# Altium PCB K60 2014 12 12.PcbDoc
Units mil, origin at the board's own origin, x right, y up, seen from the top; angles counter-clockwise.
Board outline 2553 x 1966 mil, 4 copper layers (Top Layer, Internal Plane 1, Internal Plane 2, Bottom Layer); 47 components, 90 nets, 356 pads, 34 vias.
Unrouted connection lines stored in the file: 4.
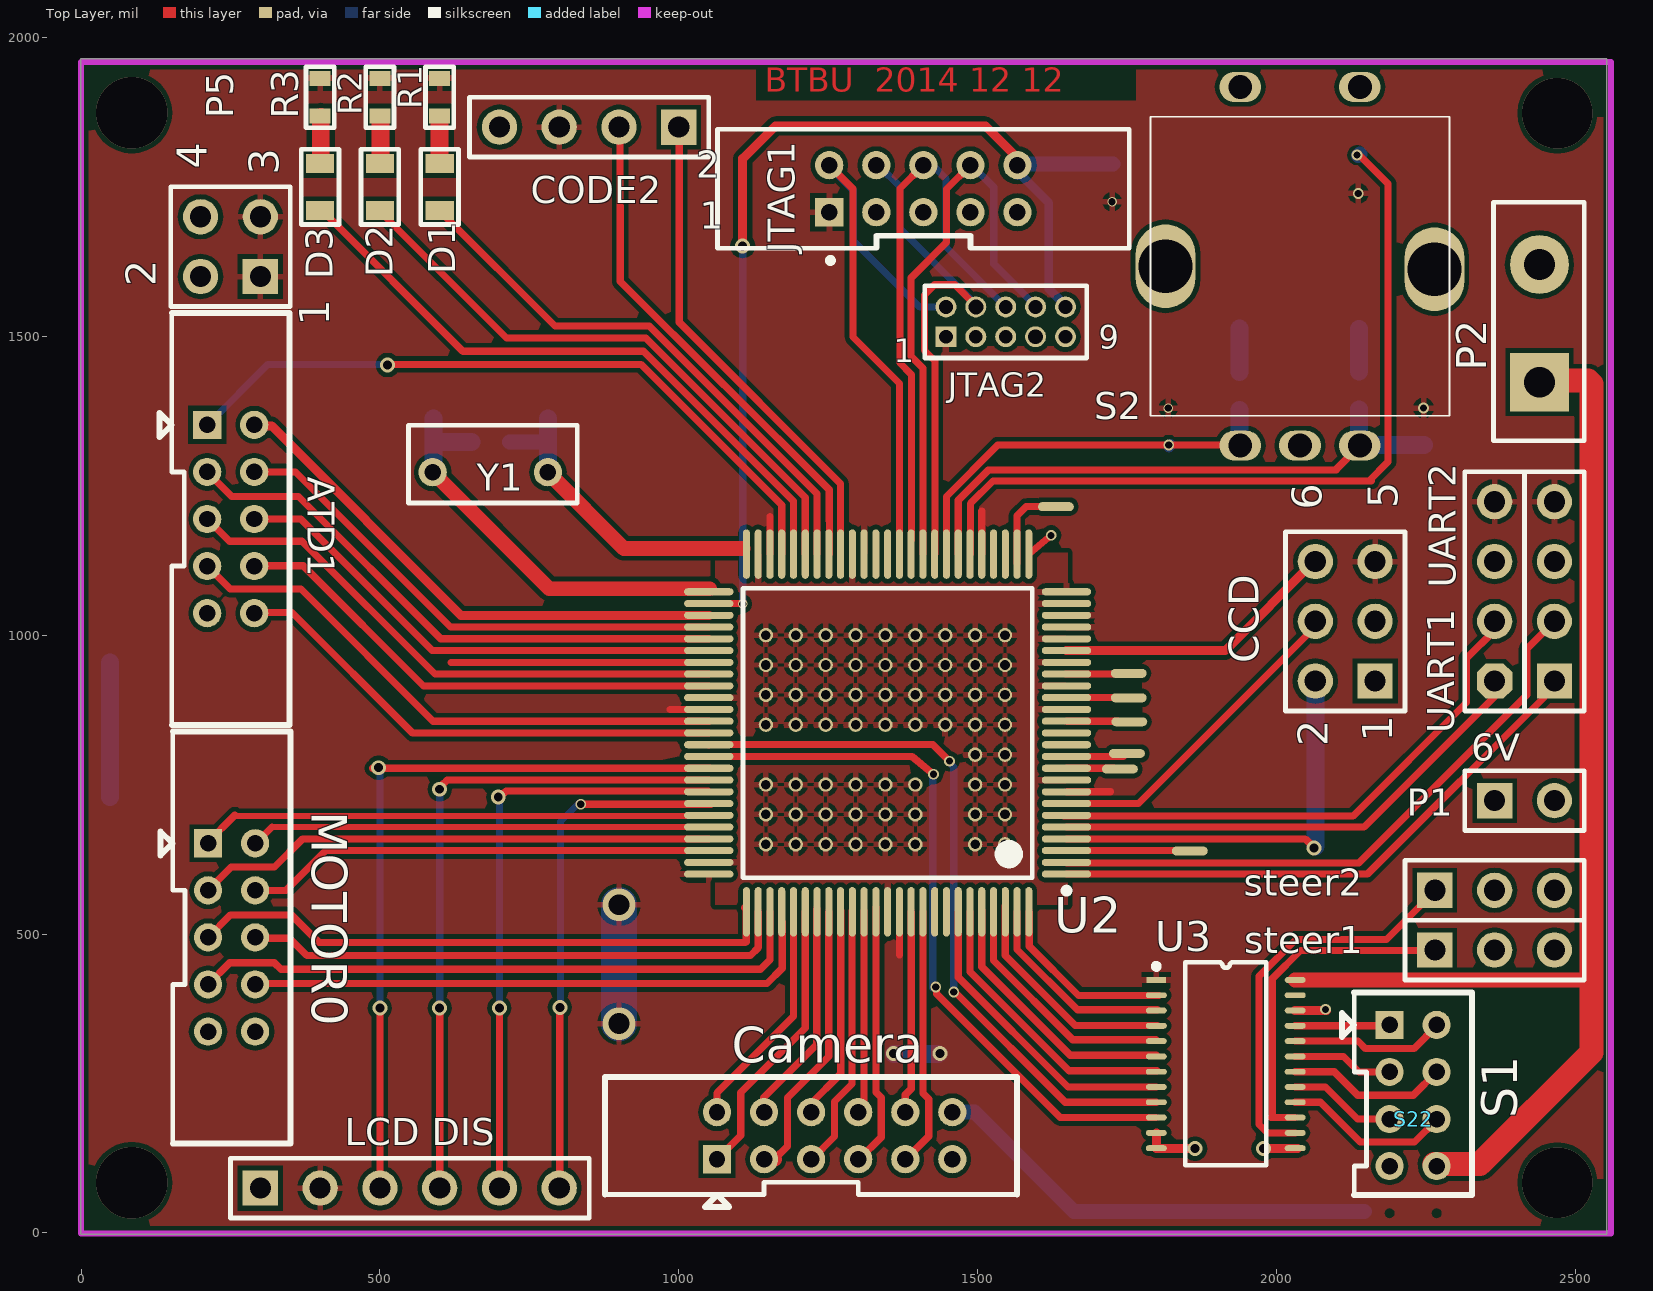
[diagram p0: Top Layer view]
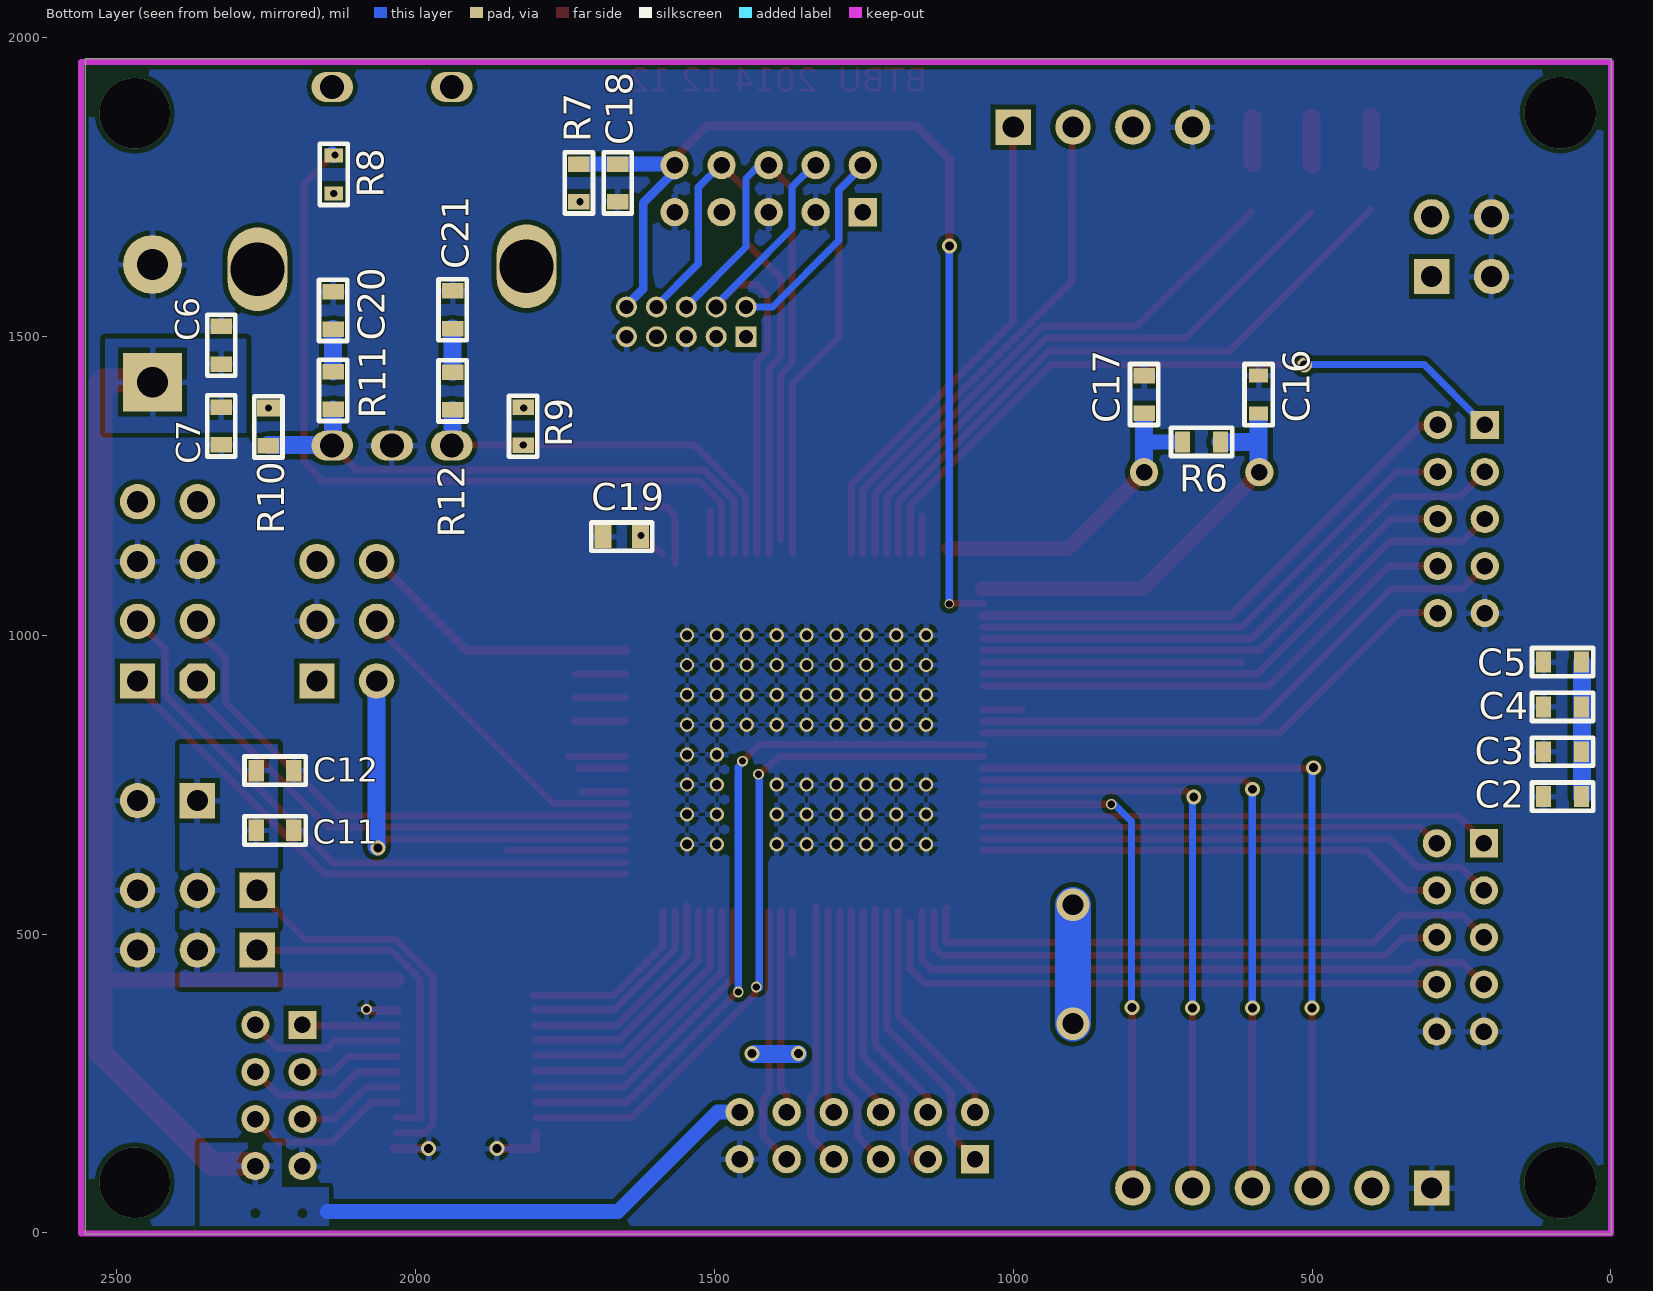
[diagram p1: Bottom Layer view, seen from below]
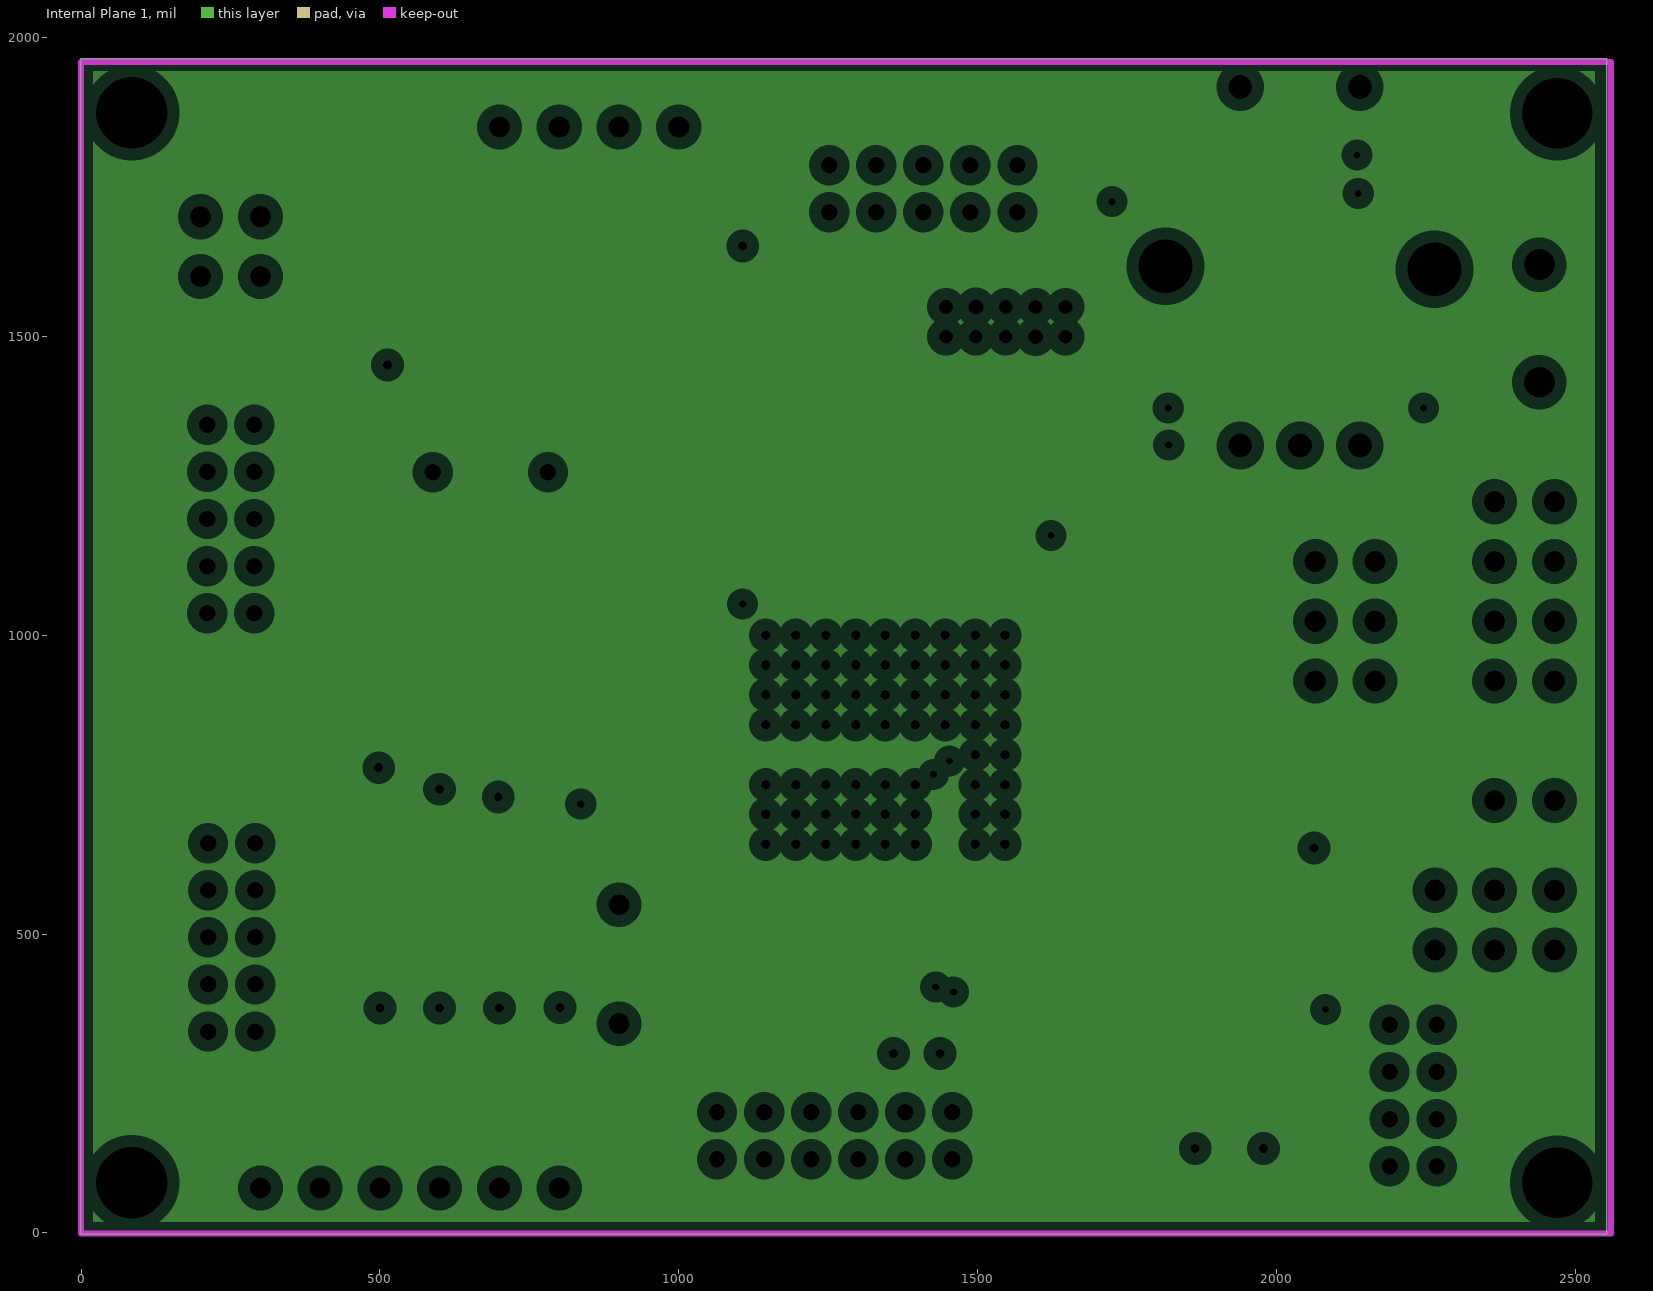
[diagram p2: Internal Plane 1, clearances drawn from the general rule]
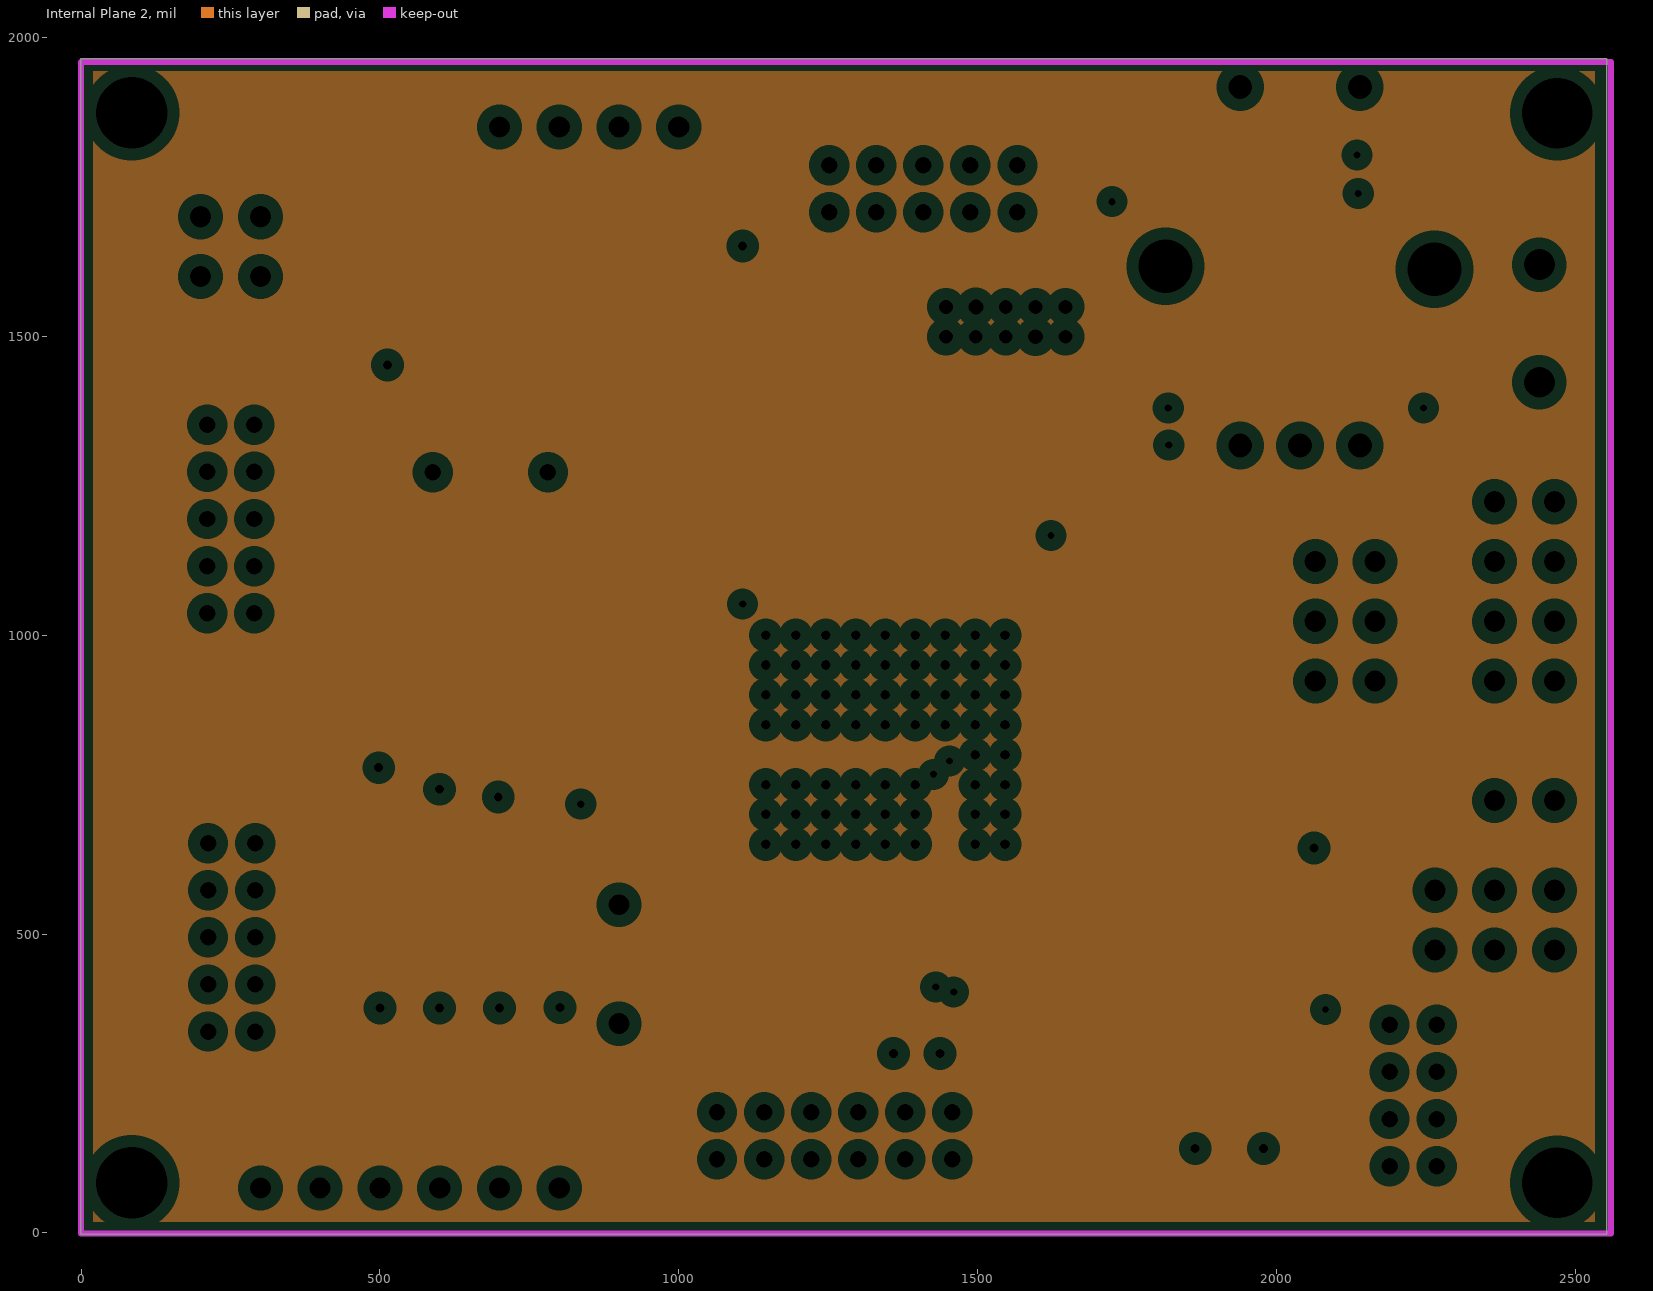
[diagram p3: Internal Plane 2, clearances drawn from the general rule]

## Layer stack, top to bottom
Top Layer: signal copper 1.4
Dielectric: dielectric 12.6, FR-4, Dk 4.8
Internal Plane 1: plane copper 1.4
Dielectric: dielectric 12.6, FR-4, Dk 4.8
Internal Plane 2: plane copper 1.4
Dielectric: dielectric 12.6, FR-4, Dk 4.8
Bottom Layer: signal copper 1.4

## Board outline
-0.22,1964.09 2552.78,1964.09 2552.78,-1.91 -0.22,-1.91

## Design rules (kind name [scope] priority, off if disabled: settings)
Clearance [All] p1: gap=6
ComponentClearance [All] p1: gap=10 collisioncheckmode=3 verticalgap=10
PlaneClearance [All] p1: clearance=20
PlaneConnect [All] p1: planeconnectstyle=Relief reliefexpansion=20 reliefentries=4 reliefconductorwidth=10 reliefairgap=10
PolygonConnect [All] p1: connectstyle=Relief reliefconductorwidth=10 reliefentries=4 polygonreliefangle="90 Angle"
RoomDefinition "K60 2014 12 12" [InComponentClass('K60 2014 12 12')] p1: confinementstyle=ConfineIn formatcopy=TRUE lockcomponents=FALSE outline 2597.78,-45.91 2815.78,-45.91 2815.78,474.09 2597.78,474.09
RoutingVias [All] p1: holewidth=14 width=20 viastyle="Through Hole" minholewidth=14 minwidth=20 maxholewidth=28 maxwidth=50
SolderMaskExpansion [All] p1: expansion=4
TestPointUsage FabricationTestPointUsage [All] p1: valid=0 allowmultiple=FALSE
Testpoint FabricationTestpoint [All] p1: side=3 testpointundercomponent=TRUE minsize=40 maxsize=100 preferedsize=60 minholesize=0 maxholesize=40 preferedholesize=32 testpointgrid=1 style=297 order=0123456789
Width [All] p1: maxlimit=300 minlimit=10 preferedwidth=12
16 further rules are at their usual default settings.

## Components (designator, comment, footprint, x,y, rotation, side; value= is the part's Value field where it differs from the comment)
ATD1 "JTAG" IDC10S#1 211.9,1352.05 r90 top locked
C2 "104" 0603#1 81,730 r180 bottom
C3 "104" 0603#1 81,805 r180 bottom
C4 "104" 0603#1 81,880 r180 bottom
C5 "104" 0603#1 81,955 r180 bottom
C6 "104" 0603#2 2325,1485 r270 bottom
C7 "104" 0603#2 2325,1350 r90 bottom
C11 "104" 0603#2 2234.96,673.23 r0 bottom
C12 "104" 0603#2 2234.96,773.23 r0 bottom
C16 "18uF" 0603#3 589.51,1402.61 r90 bottom
C17 "18uF" 0603#2 781.17,1402.65 r90 bottom
C18 "C1" 0603#2 1661.61,1756.54 r270 bottom
C19 "C1" 0603#4 1655,1165 r180 bottom
C20 "103" 0603#2 2137.79,1543.36 r270 bottom
C21 "103" 0603#2 1937.99,1544.35 r270 bottom
Camera "MHDR2X5" IDC10S#1 1063.74,124.09 r180 top locked (schematic designator VIDO)
CCD "Header 3X2" HDR2X3 2164.96,923.23 r90 top
CODE2 "编码器2" HDR1X4#1 1000,1850 r180 top
D1 "LED3" 0805 600,1750 r270 top
D2 "LED3" 0805 500,1750 r270 top
D3 "LED3" 0805 400,1750 r270 top
JTAG1 "JTAG" JTAG-2.0 1251.69,1707.6 r90 top
JTAG2 "JTAG" MHDR2X5 1446.96,1499.23 r0 top
"LCD DIS" "OLED12864" HDR1X6 300,75 r0 top
MOTOR0 "JTAG" IDC10S#1 213.34,652.09 r90 top
P1 "Header2" DIP2-2.54 2364.96,723.23 r0 top
P2 "5V接口" HDR1X2 2439.96,1423.23 r90 top
P5 "Header 2X2" HDR2X2 300,1600 r90 top
R1 "1K" 0603#1 600,1900 r90 top
R2 "1K" 0603#1 500,1900 r90 top
R3 "1K" 0603#1 400,1900 r90 top
R6 "10K" 0603#1 684.96,1323.23 r180 bottom
R7 "Res3" 0603#2 1726.61,1756.54 r90 bottom
R8 "10K" 0603#3 2136.8,1770.73 r90 bottom
R9 "10K" 0603#2 1819.88,1349.47 r270 bottom
R10 "10K" 0603#5 2246.06,1348.48 r270 bottom
R11 "10K" 0603#2 2137.79,1409.5 r270 bottom
R12 "10K" 0603#2 1937.99,1408.52 r90 bottom
S2 "" Code_Switch 2039.36,1617.18 r90 top locked
S22 "S1" IDC10S#2 2189.96,348.23 r90 top locked
steer1 "5V舵机接口" HDR1X3 2264.96,473.23 r0 top
steer2 "6V舵机接口" HDR1X3 2264.96,573.23 r0 top
U2 "MK60DX256VLL10 P100" 983-01_M 1349.43,836.39 r180 top locked
U3 "HD74LVCC3245A" HD74LVCC3245A 1798.96,423.23 r0 top
UART1 "蓝牙1(UART1)" HDR1X4#1 2464.96,923.23 r90 top
UART2 "蓝牙2(UART3)" HDR1X4#2 2364.96,923.23 r90 top
Y1 "4MHz" 晶振11.2-4.7-3.6 781.17,1272.65 r180 top

## Footprints (in the part's own frame and the unit in brackets; to place one, negate y for a bottom-side part, rotate by r counter-clockwise, add the part's x,y. Pads: shape width x height; smd on the part's side, far side on the other; paste and mask are expansions set on the pad)
0603#1 [mil]
  rect 25x35 smd: 1(-31.5,0) 2(31.5,0)
  silkscreen extent -51,-24 51,24
0603#2 [mil]
  rect 26x36 smd: 1(-31.5,0) 2(31.49,0)
  silkscreen extent -51,-24 51,24
0603#3 [mil]
  rect 23.62x31.5 smd: 1(-31.5,0) 2(31.5,0)
  silkscreen extent -51,-24 51,24
0603#4 [mil]
  rect 28x38 smd: 1(-31.5,0) 2(31.5,0)
  silkscreen extent -51,-24 51,24
0603#5 [mil]
  rect 28x38 smd: 1(-31.5,0)
  rect 26x36 smd: 2(31.5,0)
  silkscreen extent -51,-24 51,24
0805 [mm]
  rect 0.8x1.2 smd: 1(-1,0) 2(1,0)
  silkscreen extent -1.6,-0.8 1.6,0.8
983-01_M [mm]
  oval 2.1x0.3 smd: 1(-7.6,6) 2(-7.6,5.5) 3(-7.6,5) 4(-7.6,4.5) 5(-7.6,4) 6(-7.6,3.5) 7(-7.6,3) 8(-7.6,2.5) 9(-7.6,2) 10(-7.6,1.5) 11(-7.6,1) 12(-7.6,0.5) 13(-7.6,0) 14(-7.6,-0.5) 15(-7.6,-1) 16(-7.6,-1.5) 17(-7.6,-2) 18(-7.6,-2.5) 19(-7.6,-3) 20(-7.6,-3.5) 21(-7.6,-4) 22(-7.6,-4.5) 23(-7.6,-5) 24(-7.6,-5.5) 25(-7.6,-6) 51(7.6,-6) 52(7.6,-5.5) 53(7.6,-5) 54(7.6,-4.5) 55(7.6,-4) 56(7.6,-3.5) 57(7.6,-3) 58(7.6,-2.5) 59(7.6,-2) 60(7.6,-1.5) 61(7.6,-1) 62(7.6,-0.5) 63(7.6,0) 64(7.6,0.5) 65(7.6,1) 66(7.6,1.5) 67(7.6,2) 68(7.6,2.5) 69(7.6,3) 70(7.6,3.5) 71(7.6,4) 72(7.6,4.5) 73(7.6,5) 74(7.6,5.5) 75(7.6,6)
  oval 0.3x2.1 smd: 26(-6,-7.6) 27(-5.5,-7.6) 28(-5,-7.6) 29(-4.5,-7.6) 30(-4,-7.6) 31(-3.5,-7.6) 32(-3,-7.6) 33(-2.5,-7.6) 34(-2,-7.6) 35(-1.5,-7.6) 36(-1,-7.6) 37(-0.5,-7.6) 38(0,-7.6) 39(0.5,-7.6) 40(1,-7.6) 41(1.5,-7.6) 42(2,-7.6) 43(2.5,-7.6) 44(3,-7.6) 45(3.5,-7.6) 46(4,-7.6) 47(4.5,-7.6) 48(5,-7.6) 49(5.5,-7.6) 50(6,-7.6) 76(6,7.6) 77(5.5,7.6) 78(5,7.6) 79(4.5,7.6) 80(4,7.6) 81(3.5,7.6) 82(3,7.6) 83(2.5,7.6) 84(2,7.6) 85(1.5,7.6) 86(1,7.6) 87(0.5,7.6) 88(0,7.6) 89(-0.5,7.6) 90(-1,7.6) 91(-1.5,7.6) 92(-2,7.6) 93(-2.5,7.6) 94(-3,7.6) 95(-3.5,7.6) 96(-4,7.6) 97(-4.5,7.6) 98(-5,7.6) 99(-5.5,7.6) 100(-6,7.6)
  silkscreen extent -7.73,-6.15 6.15,6.82, body extent -7,-7 7,7, height 1.6
Code_Switch [mil]
  oval 50x70 hole 40: 1(-300,100) 2(-300,0) 3(-300,-100) 4(300,-100) 5(300,100)
  oval 140x100 hole 90: 6(-5,-225) 7(0,225)
  silkscreen extent -250,-250 250,250
DIP2-2.54 [mm]
  rect 1.5x1.5 hole 0.9: 1(0,0)
  round 1.5 hole 0.9: 2(2.54,0)
  silkscreen extent -1.27,-1.27 3.81,1.27
HD74LVCC3245A [mm]
  rect 0.838x0.25 smd: 1(0,0)
  oval 0.889x0.25 smd: 2(0,-0.65) 3(0,-1.3) 4(0,-1.95) 5(0,-2.6) 6(0,-3.25) 7(0,-3.9) 8(0,-4.55) 9(0,-5.2) 10(0,-5.85) 11(0,-6.5) 12(0,-7.15) 13(5.9,-7.15) 14(5.9,-6.5) 15(5.9,-5.85) 16(5.9,-5.2) 17(5.9,-4.55) 18(5.9,-3.9) 19(5.9,-3.25) 20(5.9,-2.6) 21(5.9,-1.95) 22(5.9,-1.3) 23(5.9,-0.65) 24(5.9,0)
  silkscreen extent -0.11,-7.87 4.67,0.75
HDR1X2 [mm] "Connector; Header; 2 Position"
  rect 2.5x2.5 hole 1.3: 1(0,0)
  round 2.5 hole 1.3: 2(5,0)
  silkscreen extent -2.49,-1.91 7.65,1.96
HDR1X3 [mm]
  rect 1.5x1.5 hole 0.9: 1(0,0)
  round 1.5 hole 0.9: 2(2.54,0) 3(5.08,0)
  silkscreen extent -1.27,-1.27 6.35,1.27
HDR1X4#1 [mm] "Connector; Header; 4 Position"
  rect 1.5x1.5 hole 0.9: 1(0,0)
  round 1.5 hole 0.9: 2(2.54,0) 3(5.08,0) 4(7.62,0)
  silkscreen extent -1.27,-1.27 8.89,1.27
HDR1X4#2 [mm]
  oct 1.5x1.5 hole 0.9: 1(0,0)
  round 1.5 hole 0.9: 2(2.54,0) 3(5.08,0) 4(7.62,0)
  silkscreen extent -1.27,-1.27 8.89,1.27
HDR1X6 [mm]
  rect 1.5x1.5 hole 0.9: 1(0,0)
  round 1.5 hole 0.9: 2(2.54,0) 3(5.08,0) 4(7.62,0) 5(10.16,0) 6(12.7,0)
  silkscreen extent -1.27,-1.27 13.97,1.27
HDR2X2 [mm] "Connector; Header; 2x2 Position"
  rect 1.5x1.5 hole 0.9: 1(0,0)
  round 1.5 hole 0.9: 2(0,2.54) 3(2.54,0) 4(2.54,2.54)
  silkscreen extent -1.27,-1.27 3.81,3.81
HDR2X3 [mm] "Connector; Header; 3x2 Position"
  rect 1.5x1.5 hole 0.9: 1(0,0)
  round 1.5 hole 0.9: 2(0,2.54) 3(2.54,0) 4(2.54,2.54) 5(5.08,0) 6(5.08,2.54)
  silkscreen extent -1.27,-1.27 6.35,3.81
IDC10S#1 [mm]
  rect 1.2x1.2 hole 0.7: 1(-0.006,0.022)
  round 1.2 hole 0.7: 2(-0.006,-1.978) 3(-2.006,0.022) 4(-2.006,-1.978) 5(-4.006,0.022) 6(-4.006,-1.978) 7(-6.006,0.022) 8(-6.006,-1.978) 9(-8.006,0.022) 10(-8.006,-1.978)
  silkscreen extent -12.76,-3.48 4.74,2.04
IDC10S#2 [mm]
  rect 1.2x1.2 hole 0.7: 1(-0.006,0.022)
  round 1.2 hole 0.7: 2(-0.006,-1.978) 3(-2.006,0.022) 4(-2.006,-1.978) 5(-4.006,0.022) 6(-4.006,-1.978) 7(-6.006,0.022) 8(-6.006,-1.978)
  round 0 all layers, no hole: 9(-8.006,0.022) 10(-8.006,-1.978)
  silkscreen extent -7.24,-3.48 1.37,2.04
JTAG-2.0 [mm]
  rect 1.2x1.2 hole 0.7: 1(0,0)
  round 1.2 hole 0.7: 2(2,0) 3(0,-2) 4(2,-2) 5(0,-4) 6(2,-4) 7(0,-6) 8(2,-6) 9(0,-8) 10(2,-8)
  silkscreen extent -2.15,-12.75 3.52,4.75
MHDR2X5 [mil] "Connector; Header; 5x2 Position"
  rect 35x35 hole 23: 1(0,0)
  round 35 hole 23: 2(0,50) 3(50,0) 5(100,0) 6(100,50) 8(150,50) 9(200,0) 10(200,50)
  round 35 hole 25: 4(50,50) 7(150,0)
  silkscreen extent -35,-35 235,85
晶振11.2-4.7-3.6 [mm]
  round 1.2 hole 0.7: 1(0,0) 2(4.9,0)
  silkscreen extent -1.24,-1.99 5.92,1.31

## Part data
ATD1: library part "Header 3X2A", "Header, 3-Pin"
C18 C19: library part "Cap Semi"
Camera: "Header, 5-Pin, Dual row"
CCD: "Header, 3-Pin, Dual row"
CODE2 steer1 steer2: library part "Header 3", "He"
JTAG1: library part MHDR2X5
JTAG2 MOTOR0: library part MHDR2X5, "Header, 5-Pin, Dual row"
"LCD DIS": library part "Header 6", "He"
P2: library part "Header 4", "Header, 4-Pin"
P5: library part "Header 4X2", "Header, 4-Pin, Dual row"
R6: library part Res0603, "Resistor"
S2: library part SW-SPDT, "SPDT Subminiature Toggle Switch, Right Angle Mounting, Vert"
U2: library part MC68LC302PU16, "Low Cost Integr"
U3: "Octal Bus Transceiver with adjustable output voltage  and"
UART1 UART2: library part "Header 4", "He"

## Free pads (board coordinates)
  round 47.24 hole 28: 0(1457.66,123.23) 1(1457.66,201.97)
  oval 60x15 smd: 0(1631,1215) 0(1738,776) 0(1749.78,802.09) 0(1752.78,895.09) 0(1752.78,936.09) 0(1753.78,855.09) 0(1855,639)
  round 24 hole 16: 2(1145.78,1000.09) 3(1195.78,1000.09) 4(1245.78,1000.09) 5(1295.78,1000.09) 6(1345.78,1000.09) 7(1395.78,1000.09) 8(1445.78,1000.09) 9(1495.78,1000.09) 10(1545.78,1000.09) 11(1545.78,950.09) 12(1495.78,950.09) 13(1445.78,950.09) 14(1395.78,950.09) 15(1345.78,950.09) 16(1295.78,950.09) 17(1245.78,950.09) 18(1195.78,950.09) 19(1145.78,950.09) 20(1145.78,900.09) 21(1195.78,900.09) 22(1245.78,900.09) 23(1295.78,900.09) 24(1345.78,900.09) 25(1395.78,900.09) 26(1445.78,900.09) 27(1495.78,900.09) 28(1545.78,900.09) 29(1545.78,850.09) 30(1495.78,850.09) 31(1445.78,850.09) 32(1395.78,850.09) 33(1345.78,850.09) 34(1295.78,850.09) 35(1245.78,850.09) 36(1195.78,850.09) 37(1145.78,850.09) 45(1495.78,800.09) 46(1545.78,800.09) 47(1545.78,750.09) 48(1495.78,750.09) 50(1395.78,750.09) 51(1345.78,750.09) 52(1295.78,750.09) 53(1245.78,750.09) 54(1195.78,750.09) 55(1145.78,750.09) 56(1145.78,700.09) 57(1195.78,700.09) 58(1245.78,700.09) 59(1295.78,700.09) 60(1345.78,700.09) 61(1395.78,700.09) 63(1495.78,700.09) 64(1545.78,700.09) 65(1545.78,650.09) 66(1495.78,650.09) 68(1395.78,650.09) 69(1345.78,650.09) 70(1295.78,650.09) 71(1245.78,650.09) 72(1195.78,650.09) 73(1145.78,650.09)

## Via types
v1: diameter 25, hole 15, Top Layer to Bottom Layer, 14 vias
v2: diameter 18, hole 12, Top Layer to Bottom Layer, 11 vias
v3: diameter 16, hole 12, Top Layer to Bottom Layer, 3 vias
v4: diameter 55, hole 35, Top Layer to Bottom Layer, 2 vias
v5: diameter 118.11, hole 118.11, Top Layer to Bottom Layer, 2 vias
v6: diameter 120, hole 120, Top Layer to Bottom Layer, 2 vias

## Nets (pads, with @x,y where several pads share a name; then routed paths per layer and width w, separated by ;. In a path a pad name is that pad's centre, name@x,y a point inside that pad or via, vN(x,y) a via of type N, cw(c..) or ccw(c..) an arc to the next point about the centre after c; other vN are vias at no path point)
3.3V: "LCD DIS.2" C2.2 C3.2 C4.2 C5.2 CCD.5 CODE2.3 JTAG1.1 JTAG2.1 P5.1 P5.3 R1.2 R2.2 R3.2 R7.1 R8.1 R9.1 R10.1 U2.8 U2.22 U2.23 U2.30 U2.40 U2.48 U2.61 U2.75 U2.89 U3.1 UART1.4 UART2.4 | length 843.7
  Top Layer w12: 985.23,875.77 U2.61 ; U2.48 1152.58,1198.58 ; 1369.12,465.12 U2.89 ; U2.30 1506.91,1207.91 ; U2.8 1721.97,737.97
  Bottom Layer w30: C2.2@48.51,729 C5.2@48.51,954 ; v1@1360,299 v1@1434,299
  Bottom Layer w60: v4(900,350) v4(900,549)
  other v1: 1359,300 1437,300
  other v2: 2246.06,1379.98 2136.78,1739.09
  other v3: 1818.9,1379.92 1724.96,1725.23
5V: C6.2 C7.2 P2.1 pad.1 S22.8 U3.24 | length 2797.4
  Top Layer w25: U3.24 2523.77,423.23 ; 2521,1426 2522,1425
  Top Layer w40: S22.8@2264,115 2340,115 2526.78,301.78 2526.78,1420.22 2522,1425 ; P2.1@2441,1426 2521,1426
  Bottom Layer w25: pad.1 1495.03,201.97 1661,36 2147,36
6V: C11.2 C12.2 P1.1 steer1.2 steer2.2
ADC0_DP1: pad.0@1753.78,855.09 U2.14 | length 86.1
  Top Layer w12: U2.14 pad.0@1734.78,856.08
ADC1_DP1: pad.0@1752.78,895.09 U2.16 | length 84.1
  Top Layer w12: U2.16 pad.0@1732.78,895.45
AO: CCD.6 U2.20 | length 480.3
  Top Layer w15: U2.20 1913.92,974.19 CCD.6@2065.96,1126.23
BKPT*/TMS: JTAG1.2 JTAG2.2 U2.37 | length 1043.1
  Top Layer w10: 1291.22,1746.81 1291.22,1745.98 1291.3,1745.91
  Top Layer w12: JTAG1.2 1291.22,1746.81 ; 1291.3,1745.91 1291.3,1498.89 1369.12,1421.07 U2.37
  Bottom Layer w12: JTAG1.2 1251.69,1784.5 1291.96,1744.23 1291.96,1660.23 1402.96,1549.23 JTAG2.2
CLK: CCD.4 U2.7 | length 543.6
  Top Layer w12: U2.7@1646.65,718.29 1769.02,718.29 2065.46,1014.73 CCD.4@2067.46,1014.73
CLK_LCD: "LCD DIS.3" U2.66 | length 1264
  Top Layer w12: v1@487.96,777.23 U2.66@1051.96,777.23 ; 500,76.23 v1(500,376.23)
  Bottom Layer w12: v1@500,377.23 v1@500,777.23
  other v1: 498,778.23
CS: "LCD DIS.5" U2.68 | length 1006.3
  Top Layer w12: 700,76.23 v1(700,376.23) ; v1@701,731.23 705.77,736 708,736 711.23,739.23 U2.68@1049.96,739.23
  Bottom Layer w12: v1@700,377.23 v1@700,731.23
  other v1: 698,729.23
D/C: "LCD DIS.6" U2.69 | length 879.2
  Top Layer w12: 801,75.23 v1(801,377.23) ; v2@835,717.23 U2.69@1053.96,717.23
  Bottom Layer w12: v1@802,375.23 802,688.23 v2@834,720.23
  other v2: 836,717.23
DACOUT: pad.0@1631,1215 U2.27 | length 142
  Top Layer w12: U2.27@1565.78,1120.09 1565.78,1199.78 1581,1215 pad.0@1621.78,1215
DSCLK/TCLK: JTAG1.4 JTAG2.4 U2.34 | length 858.2
  Top Layer w12: U2.34@1428.49,1135.61 1428.49,1458.7 1410.96,1476.23 1410.96,1569.23 1427.96,1586.23 1461.96,1586.23 JTAG2.4@1498.96,1549.23
  Bottom Layer w12: JTAG1.4 1333.85,1786.34 1369.96,1750.23 1369.96,1680.23 1449.96,1600.23 ; 1450.96,1599.23 JTAG2.4@1499.96,1550.23
DSI/TSI: JTAG1.8 JTAG2.8 U2.35 | length 984.3
  Top Layer w12: U2.35 1408.49,1446.7 1388.78,1466.41 1388.78,1598.05 1448.06,1657.33 1448.06,1746.22 ; 1447.79,1746.22 JTAG1.8
  Bottom Layer w12: JTAG1.8 1489.85,1786.34 1526.96,1749.23 1526.96,1621.23 JTAG2.8@1598.96,1549.23
DSO/TSO: JTAG1.6 JTAG2.6 U2.36 | length 954.3
  Top Layer w12: U2.36@1389.12,1159.51 1389.12,1436.07 1370.06,1455.13 1370.06,1747.22 JTAG1.6
  Bottom Layer w12: JTAG1.6 1424.85,1786.34 1446.96,1764.23 1446.96,1649.23 JTAG2.6
EXTAL: C17.1 R6.1 U2.50 Y1.1 | length 534.2
  Top Layer w25: Y1.1@781.17,1273.68 781.17,1272.02 908.06,1145.13 U2.50@1107.82,1145.13
  Bottom Layer w25: R6.1 781.17,1323.23
  Bottom Layer w30: Y1.1@781.17,1273.68 C17.1@781.17,1362.26
GND: "LCD DIS.1" ATD1.9 C2.1 C3.1 C4.1 C5.1 C6.1 C7.1 C11.1 C12.1 C16.2 C17.2 C18.2 C19.1 C20.1 C21.1 CCD.3 CODE2.4 JTAG1.3 JTAG1.5 JTAG1.9 JTAG2.3 JTAG2.5 JTAG2.9 MOTOR0.9 MOTOR0.10 P1.2 P2.2 P5.2 P5.4 pad.0@1457.66,123.23 pad.2 pad.3 pad.4 pad.5 pad.6 pad.7 pad.8 pad.9 pad.10 pad.11 pad.12 pad.13 pad.14 pad.15 pad.16 pad.17 pad.18 pad.19 pad.20 pad.21 pad.22 pad.23 pad.24 pad.25 pad.26 pad.27 pad.28 pad.29 pad.30 pad.31 pad.32 pad.33 pad.34 pad.35 pad.36 pad.37 pad.45 pad.46 pad.47 pad.48 pad.50 pad.51 pad.52 pad.53 pad.54 pad.55 pad.56 pad.57 pad.58 pad.59 pad.60 pad.61 pad.63 pad.64 pad.65 pad.66 pad.68 pad.69 pad.70 pad.71 pad.72 pad.73 S2.2 S22.7 steer1.3 steer2.3 U2.9 U2.15 U2.17 U2.19 U2.21 U2.24 U2.25 U2.41 U2.49 U2.60 U2.74 U2.88 U3.11 U3.12 U3.13 U3.22 UART1.3 UART2.3 | length 199.1
  Top Layer w15: U3.11 1798.96,141.04 1799,141 v1@1862,141 ; v1(1978,141) U3.13@2035,141 ; U3.22 v2@2084.05,372.05
  other v1: 1864,141
  other v2: 2082,374
MODE: "LCD DIS.4" U2.67 | length 1125.4
  Top Layer w12: v1@599,745.23 605.77,752 607,752 612.65,757.66 U2.67 ; 600,76.23 v1(600,376.23)
  Bottom Layer w12: v1(600,376.23) v1@600,745.23
  other v1: 600,742.23
NetC20_2: C20.2 R11.1 | length 70.9
  Bottom Layer w30: R11.1 C20.2
NetC21_2: C21.2 R12.2 | length 72.8
  Bottom Layer w30: R12.2 C21.2
NetD1_1: D1.1 R1.1 | length 77.3
  Top Layer w20: D1.1@598.42,1788.39 D1.1@600,1789.96
  Top Layer w30: D1.1@600,1789.96 R1.1@600,1865
NetD2_1: D2.1 R2.1 | length 83.6
  Top Layer w20: D2.1@496.06,1783.47 D2.1@501,1788.4
  Top Layer w30: D2.1@501,1788.4 R2.1@501,1865
NetD3_1: D3.1 R3.1 | length 79.3
  Top Layer w20: D3.1@398.43,1788.77 D3.1@401,1791.33
  Top Layer w30: D3.1@401,1791.33 R3.1@401,1867
PGA0_DP: pad.0@1752.78,936.09 U2.18 | length 86
  Top Layer w12: U2.18@1646.78,935.09 pad.0@1732.78,935.09
PTA14: D1.2 U2.44 | length 925.8
  Top Layer w12: D1.2@601.78,1708.09 792.78,1517.09 950.78,1517.09 1231.32,1236.54 U2.44
PTA15: D2.2 U2.45 | length 1002
  Top Layer w12: D2.2@501.78,1707.09 711.78,1497.09 944.78,1497.09 1211.64,1230.23 U2.45
PTA16: D3.2 U2.46 | length 1081.4
  Top Layer w12: D3.2@402.78,1713.09 402.78,1711.09 638.78,1475.09 940.91,1475.09 1191.95,1224.05 U2.46
PTA17: ATD1.1 U2.47 | length 1186
  Top Layer w12: ATD1.1@208.86,1354.01 ATD1.1@213.86,1354.01 ; v1@515,1453.09 936.78,1453.09 1172.27,1217.6 U2.47
  Bottom Layer w12: ATD1.1@213.86,1354.01 312.94,1453.09 v1@517,1453.09
  other v1: 513,1452
PTB0: ATD1.2 U2.53 | length 892.7
  Top Layer w15: ATD1.2@288.78,1350.09 318.78,1350.09 635.62,1033.25 U2.53
PTB1: ATD1.4 U2.54 | length 867.9
  Top Layer w12: ATD1.4 358.78,1273.09 618.31,1013.56 U2.54
PTB2: ATD1.3 U2.55 | length 966.8
  Top Layer w12: ATD1.3 252.03,1232.06 321.93,1232.03 ; 309.94,1232.03 363.91,1232.01 601.65,994.07 U2.55
PTB3: ATD1.6 U2.56 | length 887.3
  Top Layer w12: ATD1.6@288.78,1194.09 367.78,1194.09 587.68,974.19 U2.56 ; ATD1.6 324.6,1194.35
PTB9: U2.57 | length 431.4
  Top Layer w12: 618.78,954.51 U2.57
PTB10: ATD1.5 U2.58 | length 946.7
  Top Layer w12: ATD1.5 248.34,1157.05 369.82,1157.05 592.05,934.82 U2.58
PTB11: ATD1.8 U2.59 | length 886.2
  Top Layer w12: ATD1.8@285.78,1116.09 371.78,1116.09 572.73,915.14 U2.59 ; ATD1.8 328.34,1115.61
PTB16: ATD1.7 U2.62 | length 946.7
  Top Layer w12: ATD1.7 249.6,1077.05 367.82,1077.05 588.79,856.08 U2.62
PTB17: ATD1.10 U2.63 | length 844.7
  Top Layer w12: ATD1.10@289.78,1038.09 352.78,1038.09 554.78,836.09 U2.63@1050.78,836.09
PTB18: U2.64 U3.9 | length 1216.6
  Top Layer w12: U2.64 1424.92,817.23 v2@1453.48,788.74 ; v2@1461.96,403.23 1646.68,218.51 ; 1645.96,218.51 U3.9
  Bottom Layer w12: v2@1451.96,787.23 1459.96,779.23 v2(1459.96,403.23)
  other v2: 1452.96,789.23
PTB19: U2.65 U3.10 | length 1204.7
  Top Layer w12: U2.65 1390.16,797.03 v2(1425.96,767.23) ; v2@1430.96,411.23 1430.96,400.23 1638.28,192.91 ; 1638.96,192.91 U3.10
  Bottom Layer w12: v2@1424.96,410.23 v2@1424.96,764.23
  other v2: 1429.96,411.23
PTC0: MOTOR0.1 U2.70 | length 857.3
  Top Layer w10: 257.29,697.23 U2.70@1050.22,697.23
  Top Layer w12: MOTOR0.1@211.78,653.09 257.29,698.6
PTC1: MOTOR0.2 U2.71 | length 768.6
  Top Layer w10: 319.61,678.92 U2.71
  Top Layer w12: MOTOR0.2@292.78,652.09 319.61,678.92
PTC2: MOTOR0.3 U2.72 | length 873.4
  Top Layer w12: MOTOR0.3 251.44,612.09 323.78,612.09 370.92,659.23 U2.72
PTC3: MOTOR0.4 U2.73 | length 788
  Top Layer w12: MOTOR0.4@289.78,573.09 342.78,573.09 409.24,639.55 U2.73
PTC4: MOTOR0.5 U2.76 | length 993.6
  Top Layer w12: MOTOR0.5 250.18,532.09 351.78,532.09 397.78,486.09 1111.78,486.09 1112.78,487.09 1112.78,541.09 U2.76@1109.78,544.09
PTC5: MOTOR0.6 U2.77 | length 933.7
  Top Layer w12: MOTOR0.6@288.34,487.09 MOTOR0.6@298.34,497.09 ; MOTOR0.6@290.78,493.09 348.78,493.09 377.78,464.09 1119.78,464.09 1132.9,477.21 U2.77
PTC6: MOTOR0.7 U2.78 | length 1046.6
  Top Layer w12: MOTOR0.7 248.92,452.09 323.34,452.09 334.34,441.09 1136.78,441.09 1152.58,456.89 U2.78
PTC7: MOTOR0.8 U2.79 | length 971.8
  Top Layer w12: MOTOR0.8@291.22,412.09 296.22,417.09 1147.78,417.09 1173.27,442.58 U2.79@1173.27,519.74
PTC8: Camera.2 U2.80 | length 389.3
  Top Layer w12: Camera.2 1063.96,234.31 1191.96,362.31 U2.80@1191.96,538.23
PTC9: Camera.1 U2.81 | length 475.1
  Top Layer w12: Camera.1 1103.74,163.01 1103.74,235.09 1211.64,342.99 U2.81
PTC10: Camera.4 U2.82 | length 378.1
  Top Layer w12: Camera.4@1141.74,201.09 1141.74,226.01 1230.96,315.23 U2.82@1230.96,542.23
PTC11: Camera.3 U2.83 | length 468.9
  Top Layer w12: Camera.3@1159.88,123.23 1181.74,145.09 1181.74,226.01 1251.01,295.28 U2.83
  Top Layer w25: Camera.3 Camera.3@1159.88,123.23
PTC12: Camera.6 U2.84 | length 354.4
  Top Layer w12: Camera.6@1219.74,206.09 1219.74,215.01 1270.96,266.23 U2.84@1270.96,539.23
PTC13: Camera.5 U2.85 | length 445.4
  Top Layer w12: Camera.5@1221.74,122.09 1260.74,161.09 1260.74,220.01 1289.96,249.23 U2.85@1289.96,539.23
PTC14: Camera.8 U2.86 | length 339.3
  Top Layer w12: Camera.8@1299.96,204.23 1309.96,214.23 U2.86@1309.96,539.41
PTC15: Camera.7 U2.87 | length 441.1
  Top Layer w12: Camera.7@1301.74,123.09 1338.74,160.09 1338.74,226.45 1329.96,235.23 U2.87@1329.96,545.23
PTC16: Camera.10 U2.90 | length 339.3
  Top Layer w12: Camera.10 1378.92,231.19 1388.8,241.07 U2.90
PTC17: Camera.9 U2.91 | length 435.2
  Top Layer w12: Camera.9@1379.74,123.09 1418.31,161.67 1418.3,223.9 1408.53,233.66 1408.49,428.23 ; 1408.49,427.14 U2.91
PTC18: U2.92
PTD0: U2.93
PTD1: U2.94 U3.8 | length 517.1
  Top Layer w12: U2.94 1467.54,427.65 1651.09,244.09 ; 1650.96,244.09 U3.8
PTD2: U2.95 U3.7 | length 481.6
  Top Layer w12: U2.95 1487.23,436.96 1652.96,271.23 U3.7@1799.96,271.23
PTD3: U2.96 U3.6 | length 448.2
  Top Layer w12: U2.96@1506.78,540.09 1506.78,445.41 1654.96,297.23 U3.6@1798.96,297.23
PTD4: U2.97 U3.5 | length 407.8
  Top Layer w12: U2.97 1526.6,455.59 1658.96,323.23 U3.5@1797.96,323.23
PTD5: U2.98 U3.4 | length 385.3
  Top Layer w12: U2.98@1546.28,547.18 1546.28,463.91 1662.96,347.23 ; 1663.96,347.23 U3.4@1800.96,347.23
PTD6: U2.99 U3.3 | length 338.8
  Top Layer w12: U2.99 1565.97,474.22 1666.96,373.23 ; 1667.96,373.23 U3.3@1800.96,373.23
PTD7: U2.100 U3.2 | length 307.1
  Top Layer w12: U2.100@1586.48,537.2 1586.48,479.71 1668.96,397.23 ; 1669.96,397.23 U3.2@1802.96,397.23
PTE0: U2.1 UART1.1 | length 955
  Top Layer w12: U2.1 2151.91,600.18 2464.96,913.23 UART1.1@2464.96,922.23
PTE1: U2.2 UART1.2 | length 1028.9
  Top Layer w12: U2.2@1648.65,618.86 2137.78,618.96 2418.98,900.27 2418.96,977.21 UART1.2
PTE2: pad.0@1855,639 U2.3 | length 199.3
  Top Layer w12: U2.3 pad.0@1847.96,639.55
PTE3: CCD.2 U2.4 | length 702.4
  Top Layer w12: U2.4 2047.96,659.23 v1(2062.96,644.23)
  Bottom Layer w12: v1(2062.96,644.23) v1@2064.96,646.23
  Bottom Layer w30: v1@2064.96,646.23 CCD.2@2064.96,925.23
PTE4: U2.5 UART2.1 | length 832.7
  Top Layer w12: U2.5 2146.65,678.92 2364.96,897.23 UART2.1
PTE5: U2.6 UART2.2 | length 908.2
  Top Layer w12: U2.6@1643.96,697.23 2127.96,697.23 2317.96,887.23 2317.96,961.23 2364.96,1008.23 UART2.2
PTE24: R8.2 U2.31 | length 1354.4
  Top Layer w12: U2.31@1488.23,1135.61 1488.23,1220.54 1525.78,1258.09 2158.96,1258.09 ; v2@2137.78,1804.09 2186.78,1755.09 2186.78,1290.09 2154.78,1258.09
  Bottom Layer w25: R8.2 R8.2@2139.36,1804.78
  other v2: 2134.84,1803.15
PTE25: R10.2 R11.2 S2.3 U2.32 | length 971.6
  Top Layer w12: U2.32 1467.54,1225.85 1517.78,1276.09 2099.96,1276.09 ; 2098.27,1276.09 S2.3
  Bottom Layer w20: S2.3 S2.3@2139.56,1316.99 ; R10.2@2247.05,1317.91 R10.2@2248.03,1316.93
  Bottom Layer w30: S2.3@2137.8,1317.91 R10.2@2247.05,1317.91 ; S2.3@2137.79,1318.89 R11.2
PTE26: R9.2 R12.1 S2.1 U2.33 | length 689.2
  Top Layer w12: U2.33 1447.86,1232.17 1533.78,1318.09 S2.1@1942.78,1318.09
  Bottom Layer w12: S2.1@1937.99,1319.89 S2.1@1938.98,1318.9
  Bottom Layer w20: R9.2@1819.87,1316 R9.2@1822.43,1318.56
  Bottom Layer w30: S2.1@1937.99,1319.89 R12.1
  other v2: 1819.78,1318.09
PTM1_PHA: CODE2.1 U2.42 | length 824.3
  Top Layer w12: CODE2.1@1000.78,1848.09 1000.78,1523.41 1270.69,1253.5 U2.42
PTM1_PHB: CODE2.2 U2.43 | length 857.6
  Top Layer w12: CODE2.2@901.78,1848.09 902.23,1591.67 1251.82,1243.3 U2.43@1252.01,1135.61
RESET: C18.1 JTAG1.10 JTAG2.10 R7.2 U2.52 | length 1732.5
  Top Layer w12: U2.52 v3@1105.96,1052.93
  Top Layer w15: v1@1106.96,1654.23 1106.96,1797.23 1161.96,1852.23 1512.96,1852.23 1564.96,1800.23 JTAG1.10@1571.96,1800.23
  Bottom Layer w12: v3(1106.96,1052.23) v1@1106.96,1649.23
  Bottom Layer w15: JTAG1.10@1567.96,1774.23 1618.96,1723.23 1618.96,1579.23 JTAG2.10@1647.96,1550.23
  Bottom Layer w25: JTAG1.10@1567.96,1774.23 JTAG1.10@1567.96,1786.23 ; JTAG1.10@1568.35,1788.03 R7.2
  other v1: 1106.96,1651.23
STEER1: steer1.1 U3.15 | length 569.4
  Top Layer w12: U3.15 1991.28,192.91 1992.96,194.6 1992.96,425.23 2039.96,472.23 steer1.1@2269.96,472.23
STEER2: steer2.1 U3.14 | length 667.2
  Top Layer w12: U3.14 1985.05,167.32 1970.96,181.42 1970.96,429.23 2032.82,491.09 2183.82,491.09 steer2.1@2264.96,572.23
"TTL D1": S22.6 U3.16 | length 280.9
  Top Layer w12: U3.16 2073.68,218.5 2139.96,152.23 2230.96,152.23 S22.6@2268.96,190.23
"TTL D2": S22.5 U3.17 | length 180
  Top Layer w12: U3.17 2082.09,244.09 2135.66,190.53 S22.5
"TTL D3": S22.4 U3.18 | length 269.1
  Top Layer w12: U3.18 2096.5,269.69 2135.96,230.23 2228.8,230.23 S22.4
"TTL D4": S22.3 U3.19 | length 168.6
  Top Layer w12: U3.19 2111.91,295.28 2137.92,269.27 S22.3
"TTL D5": S22.2 U3.20 | length 259.1
  Top Layer w12: U3.20 2136.32,320.87 2148.96,308.23 2229.96,308.23 S22.2@2268.96,347.23
"TTL D6": S22.1 U3.21 | length 160
  Top Layer w12: U3.21 2190.19,346.46 S22.1@2190.96,347.23
USB_DM: pad.0@1749.78,802.09 U2.11 | length 95.1
  Top Layer w12: U2.11 pad.0@1743.78,797.03
USB_DP: pad.0@1738,776 U2.10 | length 79.4
  Top Layer w12: U2.10 pad.0@1728,777.34
"VREF OUT": C19.2 U2.26 | length 47.4
  Top Layer w12: U2.26@1586.61,1136.81 1587.05,1136.81 v2(1623,1167)
XTAL: C16.1 R6.2 U2.51 Y1.2 | length 696.1
  Top Layer w25: Y1.2 783.28,1077.62 U2.51@1051.32,1077.62
  Bottom Layer w30: Y1.2@589.51,1273.91 C16.1@589.51,1362.26 ; 589.51,1323.23 R6.2
pads on no net: CCD.1 JTAG1.7 JTAG2.7 S2.4 S2.5 S2.6 S2.7 S22.9 S22.10 U2.12 U2.13 U2.28 U2.29 U2.38 U2.39 U3.23
copper on no net:
  other v5: 2469.78,84.09 2469.78,1873.09
  other v6: 84.78,84.09 84.78,1874.09

## Polygon pours and split planes (outlines as drawn)
3.3V on Top Layer (solid, remove dead copper): 0,1959 2556,1959 2556,5 0,5
GND on Top Layer (solid, remove dead copper): 1059,1138 1651,1138 1651,549 1061.02,549 1061.02,1137
GND on Bottom Layer (solid, remove dead copper): -3,1956 2558,1956 2558,2 0,2 0,1956
5V on Bottom Layer (solid, remove dead copper): 2150,7 2361,7 2361,151 2224,151 2224,76 2145,76 2145,7
5V on Bottom Layer (solid, remove dead copper): 2289.05,1496 2519,1496 2519,1339 2283,1339 2283,1496
6V on Bottom Layer (solid, remove dead copper): 2230.31,827.76 2230.31,412 2394,412 2394,817.52 2230.31,817.52
no net on Internal Plane 1 (split plane): 2532.39,18.48 20.17,18.48 20.17,1943.7 2532.39,1943.7
no net on Internal Plane 2 (split plane): 2532.39,18.48 20.17,18.48 20.17,1943.7 2532.39,1943.7

## Keep-outs
Keep-Out Layer:
  lines w10: -0.22,-0.91 -0.22,1959.09 2559.78,1959.09 2559.78,-0.91 -0.22,-0.91

## Other copper
Top Layer:
  text "BTBU  2014 12 12" at 1144,1909 h40

## Silkscreen, mask and mechanical layers (free items; w line width, h text height)
Top Overlay:
  text "6V" at 2326,790 h45

## Dimensions
-0.22,-0.91 to -0.22,1959.09 on Mechanical 1
-0.22,-0.91 to 2559.78,-0.91 on Mechanical 1

## Text inside footprints (layer, text, board x,y; h text height)
CCD: Top Overlay "6" at 2076,1210 h50 r90; Top Overlay "5" at 2203,1212 h50 r90; Top Overlay "2" at 2086,814 h50 r90; Top Overlay "1" at 2194,822 h50 r90
JTAG1: Top Overlay "2" at 1029.25,1765.67 h45; Top Overlay "1" at 1035.16,1680.04 h45
JTAG2: Top Overlay "9" at 1702.87,1479.23 h39.37; Top Overlay "1" at 1360,1457 h39.37
P5: Top Overlay "1" at 415,1518 h50 r90; Top Overlay "2" at 125,1584 h50 r90; Top Overlay "4" at 210,1780 h50 r90; Top Overlay "3" at 331,1770 h50 r90